# Altium PCB M3406-ADJ_3V3.PcbDoc
Units mm, origin at the board's own origin, x right, y up, seen from the top; angles counter-clockwise.
Board outline 11 x 7 mm, 2 copper layers (Top Layer, Bottom Layer), stack 0.98 mm thick; 8 components, 5 nets, 19 pads, 4 vias.
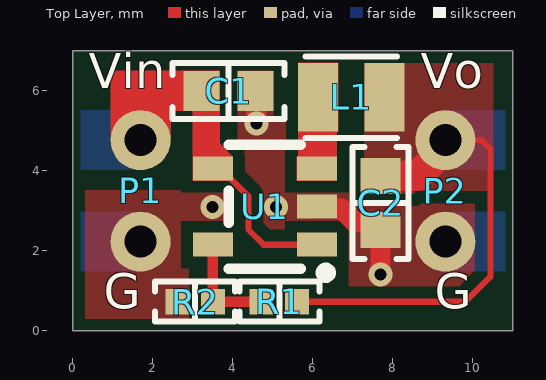
[diagram p0: Top Layer view]
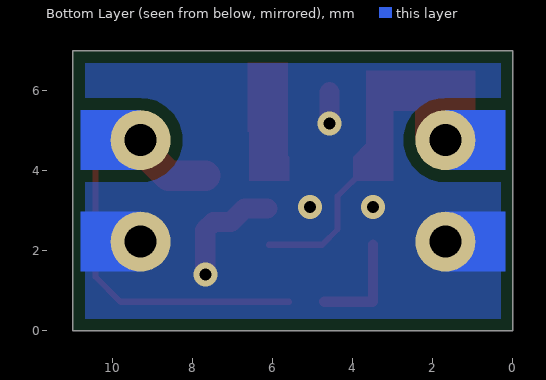
[diagram p1: Bottom Layer view, seen from below]

## Layer stack, top to bottom
Top Solder: solder mask 0.0102, Solder Resist, Dk 3.5
Top Layer: signal copper 0.0356
Dielectric 1: dielectric 0.9086, FR-4, Dk 4.8
Bottom Layer: signal copper 0.0356
Bottom Solder: solder mask 0.0102, Solder Resist, Dk 3.5

## Board outline
0,0 0,7 11,7 11,0

## Design rules (kind name [scope] priority, off if disabled: settings)
BoardOutlineClearance [All] p1: gap=0.3 ignorepadtopadclearanceinfootprint=FALSE
Clearance [All] p1: gap=0.3 ignorepadtopadclearanceinfootprint=FALSE
PolygonConnect [All] p1: connectstyle=Direct reliefconductorwidth=0.3 reliefentries=4 polygonreliefangle="45 Angle" airgapwidth=0.3
RoutingVias [All] p1: holewidth=0.711 width=1.27 viastyle="Through Hole" minholewidth=0.711 minwidth=1.27 maxholewidth=0.711 maxwidth=1.27
SolderMaskExpansion [All] p1: expansion=0.102 istentingtop=FALSE
Width [All] p1: maxlimit=2 minlimit=0.1 preferedwidth=0.254
30 further rules are at their usual default settings.

## Components (designator, comment, footprint, x,y, rotation, side; value= is the part's Value field where it differs from the comment)
C1 "Capacitor" "CAP 0603_1608" 3.89,6 r180 top value=10u
C2 "Capacitor" "CAP 0603_1608" 7.69,3.2 r90 top value=10u
L1 "Inductor" IND-SMD_L2.0-W1.6 6.956,5.842 r180 top value=2.2uH
P1 "Header_2" PAD_2.54mmx2#1 1.69,3.5 r0 top
P2 "Header_2" PAD_2.54mmx2#2 9.31,3.5 r180 top
R1 "Resistor" "RES 0402_1005" 5.16,0.73 r0 top value=100k
R2 "Resistor" "RES 0402_1005" 3.057,0.73 r0 top value=22k1
U1 "M3406-ADJ" SOT-23-5_L3.0-W1.7-P0.95-LS2.8-BR 4.797,3.105 r0 top locked

## Footprints (in the part's own frame and the unit in brackets; to place one, negate y for a bottom-side part, rotate by r counter-clockwise, add the part's x,y. Pads: shape width x height; smd on the part's side, far side on the other; paste and mask are expansions set on the pad)
"CAP 0603_1608" [mm] "Chip Capacitor, 2-Leads, Body 1.60x0.80mm, IPC Medium Density"
  rect 0.9x1 smd: 1(-0.675,0) 2(0.675,0)
  silkscreen extent -1.4,-0.7 1.4,0.7, body extent -0.8,-0.41 0.8,0.41, height 0.82
IND-SMD_L2.0-W1.6 [mm]
  rect 1x1.72 smd paste+0 mask+0.051: 1(0.828,0) 2(-0.828,0)
  silkscreen extent -1.14,-1.02 1.14,1.02, body extent -1.01,-0.8 1.01,0.8, height 1.12
PAD_2.54mmx2#1 [mm]
  round 1.5 hole 0.8: 1(0,1.27) 2(0,-1.27)
  Bottom Layer region: -1.5,0.52 0,0.52 0,2.02 -1.5,2.02
  Bottom Layer region: -1.5,-2.02 0,-2.02 0,-0.52 -1.5,-0.52
PAD_2.54mmx2#2 [mm]
  round 1.5 hole 0.8: 1(0,-1.27) 2(0,1.27)
  Bottom Layer region: -1.5,-2.02 0,-2.02 0,-0.52 -1.5,-0.52
  Bottom Layer region: -1.5,0.52 0,0.52 0,2.02 -1.5,2.02
"RES 0402_1005" [mm] "Chip Resistor, 2-Leads, Body 1.0x0.5mm, IPC High Density"
  rect 0.6x0.64 smd: 1(-0.44,0) 2(0.44,0)
  silkscreen extent -1,-0.5 1,0.5, body extent -0.5,-0.25 0.5,0.25, height 0.35
SOT-23-5_L3.0-W1.7-P0.95-LS2.8-BR [mm]
  rect 1x0.6 smd paste+0 mask+0.051: 1(1.3,-0.95) 2(1.3,0) 3(1.3,0.95) 4(-1.3,0.95) 5(-1.3,-0.95)
  silkscreen extent -0.9,-1.78 1.65,1.55, body extent -1.47,-1.37 1.42,1.41, height 1.2

## Part data
C1 C2: library part GRM188R61E106KA73D, Case/Package=0603, Dielectric=X5R, Manufacturer=Murata, Max Operating Temperature=+85, Min Operating Temperature=-55, Rated Voltage=25V, Temperature Coefficient="-15 to 15 %", Tolerance=10%, Category=MLCC, CPN=10010500040, Height=0.8, Lead Free=YES, Length=1.6, Mounting Type=SMD, MPN=GRM188R61E106KA73D, RoHS Compliant=YES, Width=0.8
L1: library part WPN201610U2R2MTY01, Case/Package=201610, Manufacturer=Sunlord(顺络), Max Operating Temperature=+125, Min Operating Temperature=-40, Rated Current=2A, Tolerance=20%, Category="Power Inductor", DCR=115mΩ, Height=1, Length=2, Mounting Type=SMD, MPN=WPN201610U2R2MTY01, Width=1.6
P1 P2: library part PAD_2.54MM_2, "SMD，DIP", Mounting Type=直插, MPN=PAD_2.54MM_2
R1: library part RC0402FR-07100KL, Case/Package=0402, Manufacturer=Yageo, Max Operating Temperature=+155, Min Operating Temperature=-55, Rated Power="62.5 mW (1/16 W)", Rated Voltage=50V, Temperature Coefficient="100 ppm/C", Tolerance=1%, CPN=10010300020, Height=0.35, Length=1.0, Mounting Type=SMD, MPN=RC0402FR-07100KL, Width=0.5
R2: library part RC0402FR-0722K1L, Case/Package=0402, Manufacturer=Yageo, Max Operating Temperature=+155, Min Operating Temperature=-55, Rated Power="62.5 mW (1/16 W)", Rated Voltage=50V, Temperature Coefficient="100 ppm/C", Tolerance=1%, Height=0.35, Length=1.0, Mounting Type=SMD, MPN=RC0402FR-0722K1L, Width=0.5
U1: "Vin=2V~6V,800mA,DCDC", Manufacturer=西安航天民芯, Max Operating Temperature=+85, Min Operating Temperature=-40, Supply Voltage=2V~6V, Category="Step-Down Converter", Mounting Type=SMD, MPN=M3406-ADJ

## Via types
v1: diameter 0.6, hole 0.3, Top Layer to Bottom Layer, tented both sides, 4 vias

## Nets (pads, with @x,y where several pads share a name; then routed paths per layer and width w, separated by ;. In a path a pad name is that pad's centre, name@x,y a point inside that pad or via, vN(x,y) a via of type N, cw(c..) or ccw(c..) an arc to the next point about the centre after c; other vN are vias at no path point)
3V3: C2.2 L1.2 P2.1 R1.2 | length 11.6
  Top Layer w0.152: R1.2 9.813,0.73 10.435,1.352 10.435,4.555 10.22,4.77 P2.1 P2.1@9.31,4.579
  Top Layer w0.762: C2.2 8.606,3.875 P2.1@9.31,4.579
GND: C1.1 C2.1 P1.2 P2.2 R2.1 U1.2 | length 3.7
  Top Layer w0.508: v1(4.584,5.182) C1.1@4.584,5.969 ; U1.2@6.143,3.059 6.712,3.059 7.05,2.721 7.494,2.721 C2.1 v1(7.69,1.411)
  other v1: 3.492,3.104 5.075,3.104
NetL1_1: L1.1 U1.3
NetR1_1: R1.1 R2.2 U1.5 | length 2.6
  Top Layer w0.254: U1.5 R2.2 R1.1
VCC: C1.2 P1.1 U1.1 U1.4 | length 3.9
  Top Layer w0.152: U1.4 3.697,4.055 4.386,3.366 4.386,2.535 4.766,2.155 U1.1

## Polygon pours and split planes (outlines as drawn)
GND on Top Layer "GND_L01_P002" (solid, remove dead copper, pour order 2): 0.239,7.003 0.19,6.954 0.19,0 10.81,0 10.81,7 0.19,7
3V3 on Top Layer "3V3_L01_P000" (solid, pour order 0): 7.303,6.702 10.782,6.702 10.81,6.674 10.81,3.5 10.735,3.425 7.258,3.425 7.284,3.425 7.284,3.587 7.284,6.639
GND on Bottom Layer "GND_L02_P001" (solid, remove dead copper, pour order 1): 0.19,7 0.19,0 10.81,0 10.81,7 0.19,7

## Other copper
Top Layer:
  pour cut-out: 10.81,3.175 10.81,3.5 8.54,3.5 8.54,3.175
  pour cut-out: 2.897,1.201 3.062,1.201 3.062,1.555 2.897,1.555
  pour cut-out: 3.915,4.655 4.115,4.655 4.115,5.22 3.915,5.22
  pour cut-out: 5.322,6.694 5.322,5.22 5.009,5.22 5.009,6.5 4.115,6.5 4.115,5.22 3.665,5.22 3.665,6.694
  region net VCC: 3.665,6.5 0.94,6.5 0.94,4.77 2.44,4.77 2.44,5.5 3.665,5.5
  pour cut-out: 4.051,1.05 6.897,1.05 6.897,1.75 4.051,1.75
  pour cut-out: 0.254,3.517 2.918,3.517 2.918,4.196 0.254,4.196
  region net NetL1_1: 5.597,3.755 5.597,4.355 5.628,4.386 5.628,6.702 6.628,6.702 6.628,4.982 6.597,4.951 6.597,3.755
  region net VCC: 2.765,5.735 2.997,5.503 2.997,3.755 3.997,3.755 3.997,4.355 3.665,4.687 3.665,6.5 2.765,6.5

## Silkscreen, mask and mechanical layers (free items; w line width, h text height)
Top Overlay:
  text "Vin" at 0.395,5.781 h1.5
  text "Vo" at 8.699,5.781 h1.5
  text "G" at 0.77,0.272 h1.5
  text "G" at 9.046,0.272 h1.5
Mechanical 1:
  the board outline again, w0.2